# EAGLE board glove-pcb (EAGLE 7.6.0)
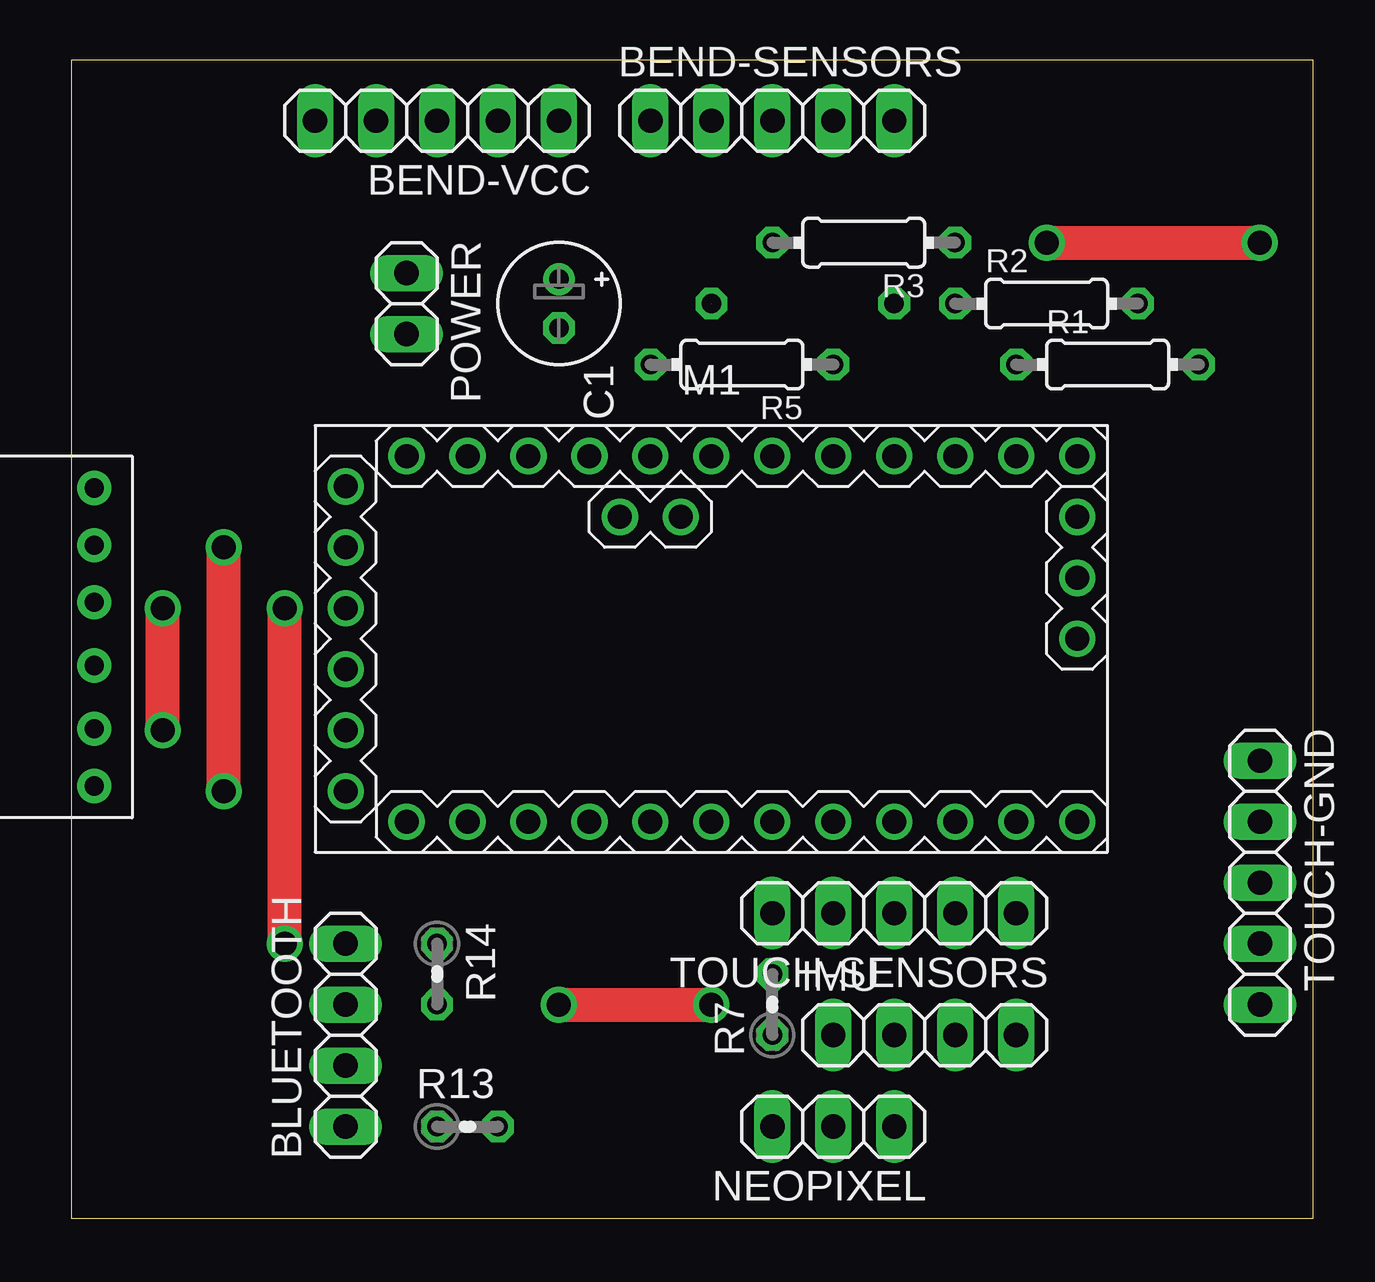
[diagram p0: board, top side]
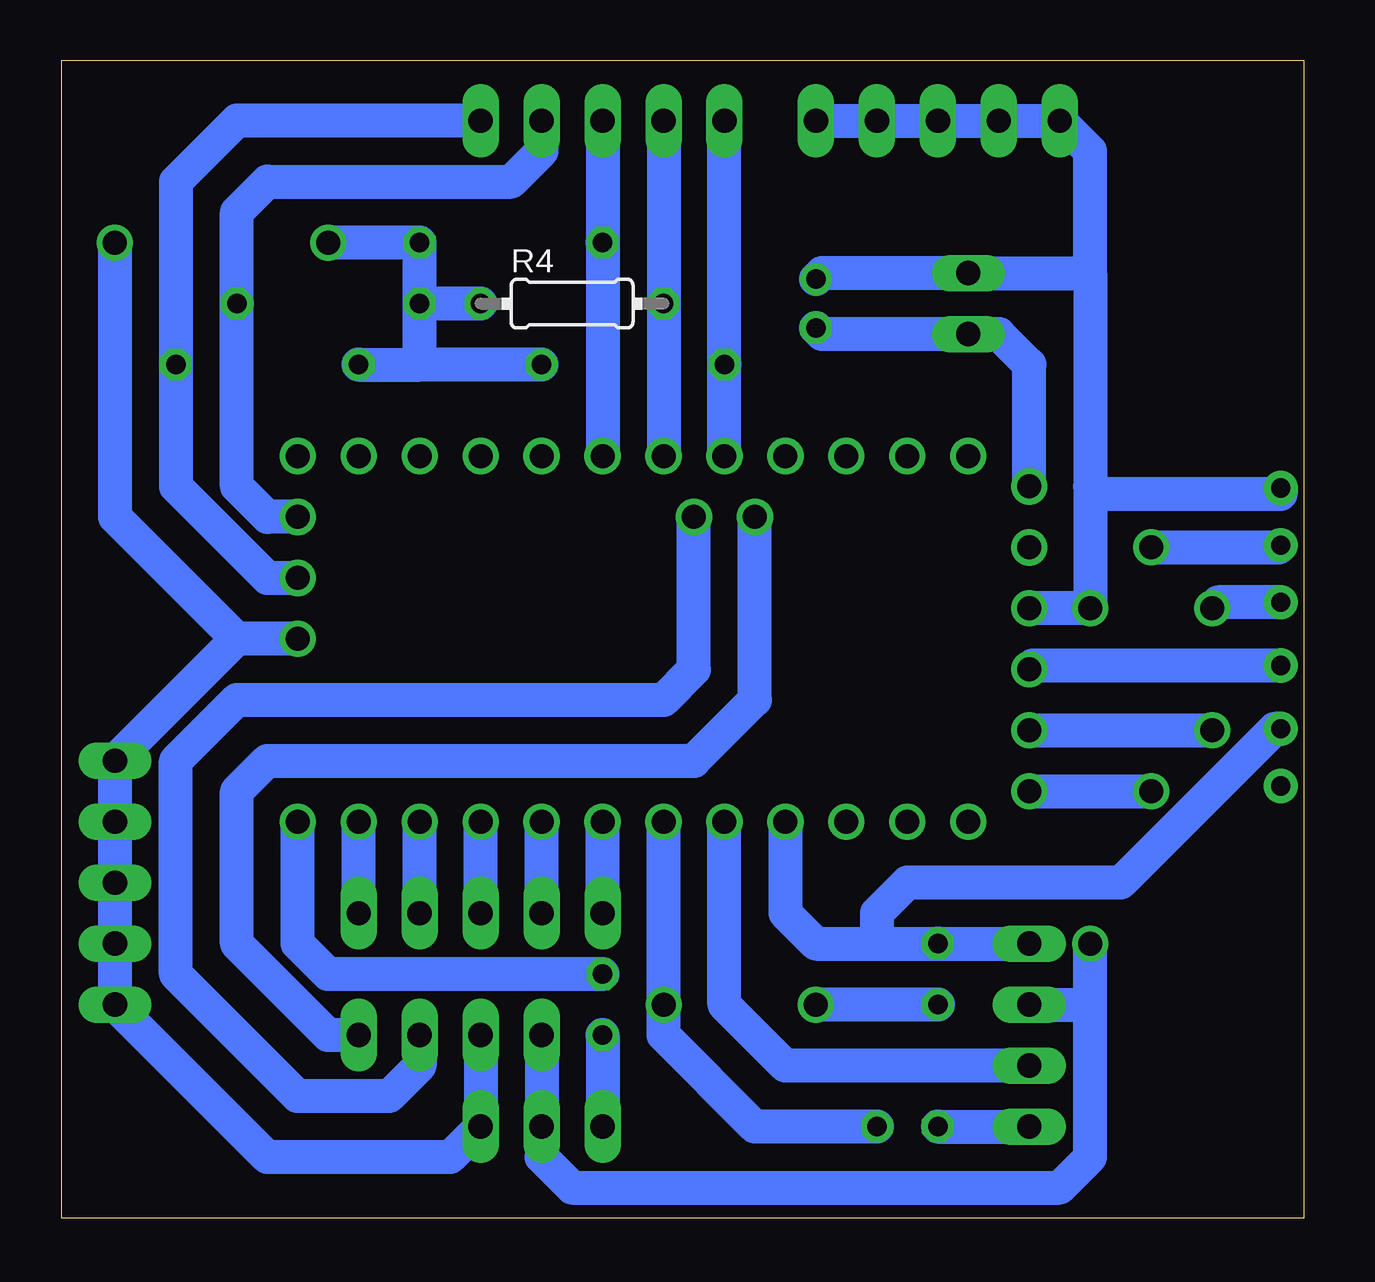
[diagram p1: board, bottom side, seen from below]

Size 51.74 x 48.25 mm. Coordinates in mm from the lower left corner, seen from the top.
Outline: 0,0 51.74,0 51.74,48.25 0,48.25 0,0
Copper layers (1*16): Top 0.035mm / dielectric 1.5mm / Bottom 0.035mm
Design rules "default *": minimum track width 10mil, minimum drill 24mil, track to track 8mil, track to pad 8mil, pad to pad 8mil, via to via 8mil, smd to smd 8mil, copper to edge 40mil, drill to drill 8mil, minimum pad ring 10mil, minimum via ring 8mil, stop-mask expansion 4mil, vias tented up to drill 0mil, thermal gap 10mil

## Footprints (pad centres in the part's own frame; a part is rotated, then mirrored left to right if it is on the bottom)
1X05 = drill 1.016 long: 1 -5.08,0; 2 -2.54,0; 3 0,0; 4 2.54,0; 5 5.08,0
1X04 = drill 1.016 long: 1 -3.81,0; 2 -1.27,0; 3 1.27,0; 4 3.81,0
E2-5 = drill 0.813 pad 1.27: + -1.016,0 | drill 0.813 pad 1.27 octagon: - 1.016,0
ARDUINO-PRO-MINI = drill 1: J1.1 -15.24,6.35; J1.2 -15.24,3.81; J1.3 -15.24,1.27; J1.4 -15.24,-1.27; J1.5 -15.24,-3.81; J1.6 -15.24,-6.35; J2.1 -1.27,5.08; J2.2 -3.81,5.08; J3.1 15.24,0; J3.2 15.24,2.54; J3.3 15.24,5.08; J6.1 -12.7,7.62; J6.2 -10.16,7.62; J6.3 -7.62,7.62; J6.4 -5.08,7.62; J6.5 -2.54,7.62; J6.6 0,7.62; J6.7 2.54,7.62; J6.8 5.08,7.62; J6.9 7.62,7.62; J6.10 10.16,7.62; J6.11 12.7,7.62; J6.12 15.24,7.62; J7.1 15.24,-7.62; J7.2 12.7,-7.62; J7.3 10.16,-7.62; J7.4 7.62,-7.62; J7.5 5.08,-7.62; J7.6 2.54,-7.62; J7.7 0,-7.62; J7.8 -2.54,-7.62; J7.9 -5.08,-7.62; J7.10 -7.62,-7.62; J7.11 -10.16,-7.62; J7.12 -12.7,-7.62
1X03 = drill 1.016 long: 1 -2.54,0; 2 0,0; 3 2.54,0
1X02 = drill 1.016 long: 1 -1.27,0; 2 1.27,0
0204/7 = drill 0.813 octagon: 1 -3.81,0; 2 3.81,0
0204V = drill 0.813 octagon: 1 -1.27,0; 2 1.27,0
MICRO-USB-PAC = drill 0.8 pad 1.422: 3V3 1.587,1.333; 5V 1.587,13.748; DTR 1.587,3.715; GND 1.587,11.367; RXD 1.587,6.096; TXD 1.587,8.731

## Placement (x,y rotation side)
BEND-SENSORS  [1X05]  29.21,45.72 0 top
BEND-VCC  [1X05]  15.24,45.72 180 top
BLUETOOTH  [1X04]  11.43,7.62 90 top
C1  [E2-5]  20.32,38.1 270 top
IMU  [1X04]  35.56,7.62 0 top
M1  ARDUINO-PRO-MINI-3.3V  [ARDUINO-PRO-MINI]  26.67,24.13 0 top
NEOPIXEL  [1X03]  31.75,3.81 180 top
POWER  [1X02]  13.97,38.1 270 top
R1  [0204/7]  43.18,35.56 0 top
R2  [0204/7]  40.64,38.1 0 top
R3  [0204/7]  33.02,40.64 180 top
R4  [0204/7]  30.48,38.1 0 bottom
R5  [0204/7]  27.94,35.56 180 top
R7  [0204V]  29.21,8.89 90 top
R13  [0204V]  16.51,3.81 0 top
R14  [0204V]  15.24,10.16 270 top
TOUCH-GND  [1X05]  49.53,13.97 270 top
TOUCH-SENSORS  [1X05]  34.29,12.7 180 top
U$1  MICRO-USB-DEV  [MICRO-USB-PAC]  2.54,31.75 180 top

## Library data of the parts
BEND-SENSORS BEND-VCC BLUETOOTH IMU NEOPIXEL POWER TOUCH-GND TOUCH-SENSORS = pinhead
C1 = rcl
M1 = diy-modules
R1-R5 R7 R13 R14 = resistor
U$1 = Dr_Burrows_library

## Nets
5V: U$1.5V
GND.2: M1.J6.2
N$1: NEOPIXEL.3 R7.1
N$2: IMU.3 M1.J2.1
N$3: M1.J7.1 R7.2
N$4: IMU.4 M1.J2.2
N$6: M1.J1.4 U$1.TXD
N$7: M1.J1.5 U$1.RXD
N$8: BLUETOOTH.1 R13.1
N$9: BLUETOOTH.2 M1.J7.8
N$10: BEND-SENSORS.1 M1.J6.5 R5.2
N$11: BLUETOOTH.4 M1.J7.9 R14.1 U$1.GND
N$12: IMU.2 M1.J3.1 NEOPIXEL.1 R1.1 R2.1 R3.1 R4.1 R5.1 TOUCH-GND.1 TOUCH-GND.2 TOUCH-GND.3 TOUCH-GND.4 TOUCH-GND.5
N$13: M1.J7.2 TOUCH-SENSORS.1
N$14: M1.J7.3 TOUCH-SENSORS.2
N$15: C1.- M1.J1.1 POWER.2
N$16: M1.J7.4 TOUCH-SENSORS.3
N$17: M1.J7.5 TOUCH-SENSORS.4
N$18: M1.J7.6 TOUCH-SENSORS.5
N$19: BEND-SENSORS.2 M1.J6.6 R4.2
N$20: BEND-SENSORS.3 M1.J6.7 R3.2
N$21: BEND-SENSORS.4 M1.J3.3 R2.2
N$22: BEND-SENSORS.5 M1.J3.2 R1.2
N$23: M1.J7.7 R13.2 R14.2
N$24: M1.J1.6 U$1.DTR
N$25: BEND-VCC.1 BEND-VCC.2 BEND-VCC.3 BEND-VCC.4 BEND-VCC.5 BLUETOOTH.3 C1.+ IMU.1 M1.J1.3 NEOPIXEL.2 POWER.1 U$1.3V3
RAW: M1.J6.1
VCC: M1.J6.4

## Tracks (layer width: path | path; a pad name or v marks a point on that pad's centre or on a via)
N$1
  Bottom 1.422: R7.1 NEOPIXEL.3
N$2
  Bottom 1.422: IMU.3 36.83,6.35 38.1,5.08 41.91,5.08 46.99,10.16 46.99,19.05 44.45,21.59 26.67,21.59 25.4,22.86 M1.J2.1
N$3
  Bottom 1.422: R7.2 40.64,10.16 41.91,11.43 M1.J7.1
N$4
  Bottom 1.422: IMU.4 40.64,7.62 44.45,11.43 44.45,17.78 43.18,19.05 25.4,19.05 22.86,21.59 M1.J2.2
N$6
  Bottom 1.422: U$1.TXD 11.27,23.02 M1.J1.4
N$7  (via drill 1 pad 1.42)
  Top 1.422: v3.81,20.32 v3.81,25.4
  Bottom 1.422: M1.J1.5 v3.81,20.32 | U$1.RXD 3.56,25.65 v3.81,25.4
N$8
  Bottom 1.422: R13.1 BLUETOOTH.1
N$9
  Bottom 1.422: BLUETOOTH.2 21.59,6.35 24.13,8.89 M1.J7.8
N$10
  Bottom 1.422: M1.J6.5 R5.2 BEND-SENSORS.1
N$11
  Bottom 1.422: M1.J7.9 21.59,12.7 20.32,11.43 17.78,11.43 | 17.78,11.43 R14.1 BLUETOOTH.4 | U$1.GND 1.21,20.38 7.62,13.97 16.51,13.97 17.78,12.7 17.78,11.43
N$12  (via drill 1 pad 1.42)
  Top 1.422: v40.64,40.64 v49.53,40.64
  Bottom 1.422: 36.83,35.56 R2.1 | R5.1 36.83,35.56 | R4.1 R2.1 | R1.1 36.83,35.56 | R2.1 R3.1 v40.64,40.64 | v49.53,40.64 49.53,29.21 44.45,24.13 | M1.J3.1 44.45,24.13 | 44.45,24.13 TOUCH-GND.1 TOUCH-GND.2 TOUCH-GND.3 TOUCH-GND.4 TOUCH-GND.5 43.18,2.54 35.56,2.54 NEOPIXEL.1 IMU.2
N$13
  Bottom 1.422: TOUCH-SENSORS.1 M1.J7.2
N$14
  Bottom 1.422: TOUCH-SENSORS.2 M1.J7.3
N$15
  Bottom 1.422: C1.- 20.07,36.83 POWER.2 12.7,36.83 11.43,35.56 M1.J1.1
N$16
  Bottom 1.422: TOUCH-SENSORS.3 M1.J7.4
N$17
  Bottom 1.422: TOUCH-SENSORS.4 M1.J7.5
N$18
  Bottom 1.422: TOUCH-SENSORS.5 M1.J7.6
N$19  (1 unrouted)
  Bottom 1.422: BEND-SENSORS.2 R4.2 M1.J6.6
N$20
  Bottom 1.422: BEND-SENSORS.3 R3.2 M1.J6.7
N$21
  Bottom 1.422: M1.J3.3 43.18,29.21 44.45,30.48 R2.2 44.45,41.91 43.18,43.18 33.02,43.18 31.75,44.45 BEND-SENSORS.4
N$22
  Bottom 1.422: BEND-SENSORS.5 44.45,45.72 46.99,43.18 R1.2 46.99,30.48 43.18,26.67 M1.J3.2
N$23  (via drill 1 pad 1.42)
  Top 1.422: v20.32,8.89 v26.67,8.89
  Bottom 1.422: M1.J7.7 v26.67,8.89 26.67,7.62 22.86,3.81 R13.2 | R14.2 v20.32,8.89
N$24  (via drill 1 pad 1.42)
  Top 1.422: v6.35,17.78 v6.35,27.94
  Bottom 1.422: M1.J1.6 v6.35,17.78 | v6.35,27.94 1.05,27.94 U$1.DTR
N$25  (via drill 1 pad 1.42)
  Top 1.422: v8.89,11.43 v8.89,25.4
  Bottom 1.422: M1.J1.3 v8.89,25.4 8.89,30.48 | BLUETOOTH.3 8.89,8.89 | 8.89,8.89 v8.89,11.43 | BEND-VCC.1 BEND-VCC.2 BEND-VCC.3 BEND-VCC.4 BEND-VCC.5 8.89,44.45 8.89,39.37 | 8.89,8.89 8.89,2.54 10.16,1.27 30.48,1.27 31.75,2.54 NEOPIXEL.2 IMU.1 | C1.+ 20.07,39.37 POWER.1 8.89,39.37 | 8.89,39.37 8.89,30.48 | U$1.3V3 0.95,30.16 8.57,30.16 8.89,30.48